# EAGLE board PCB.PCB (EAGLE 8.3.2)
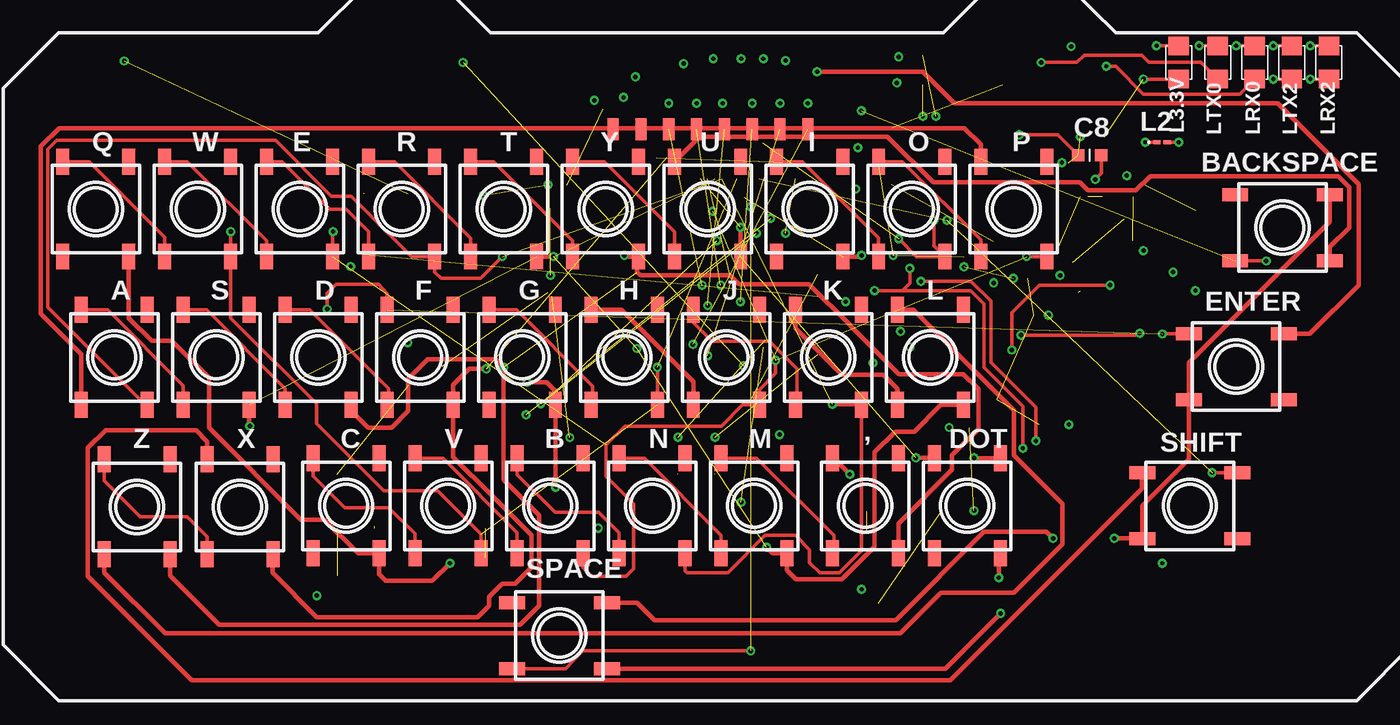
[diagram p0: board, top side]
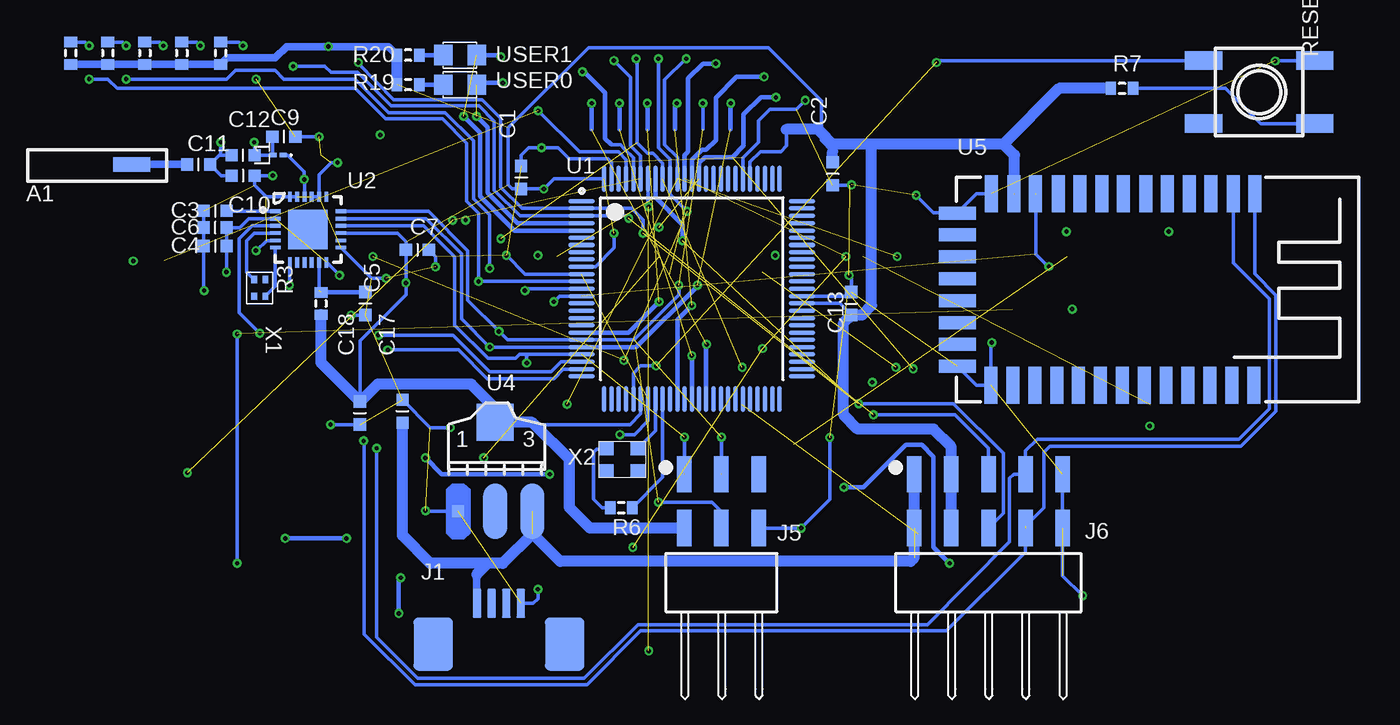
[diagram p1: board, bottom side, seen from below]

No outline drawn. Coordinates in mm, seen from the top.
Copper layers (1*16): Top 0.035mm / dielectric 1.5mm / Bottom 0.035mm
Design rules "PCB": minimum track width 6mil, minimum drill 0.35mm, track to track 6mil, track to pad 6mil, pad to pad 6mil, via to via 6mil, smd to smd 6mil, copper to edge 40mil, drill to drill 6mil, minimum pad ring 0mil, minimum via ring 0mil, stop-mask expansion 4mil, vias tented up to drill 0mil, thermal gap 10mil

## Footprints (pad centres in the part's own frame; a part is rotated, then mirrored left to right if it is on the bottom)
KHA_BUTTON_1PRIMARY = smd 1.778 x 0.889: 1 -3.251,2.261; 2 3.251,2.261; 3 -3.251,-2.261; 4 3.251,-2.261
ANTENNA_1PRIMARY = smd 2.54 x 1.016: 1 -2.159,-1.778
SMD-0603C_1PRIMARY = smd 0.838 x 0.838: 1 0,0.787; 2 0,-0.787
EINK_MODULE_1PRIMARY = smd 0.762 x 1.524: 1 -5.715,0; 2 -3.81,0; 3 -1.905,0; 4 0,0; 5 1.905,0; 6 3.81,0; 7 5.715,0; 8 7.62,0
ZIF_CONN_4P_TE84953-4_1PRIMARY = smd 0.61 x 2.007: 2 -1.499,5.385; 3 -0.508,5.385; 4 0.508,5.385; 5 1.499,5.385 | smd 2.692 x 3.607: 6 4.496,2.591; 7 -4.496,2.591
610106249121_1PRIMARY = smd 0.991 x 2.489: 1 -2.54,4.064; 2 0,4.064; 3 2.54,4.064; 4 -2.54,0.381; 5 0,0.381; 6 2.54,0.381 | drill 1.676 pad 1.676: 7 1.27,-4.064; 8 -1.27,-4.064
610110249121_1PRIMARY = smd 0.991 x 2.489: 1 -5.08,4.064; 2 -2.54,4.064; 3 0,4.064; 4 2.54,4.064; 5 5.08,4.064; 6 -5.08,0.381; 7 -2.54,0.381; 8 0,0.381; 9 2.54,0.381; 10 5.08,0.381 | drill 1.676 pad 1.676: 11 3.81,-4.064; 12 -3.81,-4.064
0603_1PRIMARY = smd 0.508 x 0.305: 1 -0.356,0; 2 0.356,0
SM-LED-0805-BLUE_1PRIMARY = smd 1.27 x 1.397: 1 0,0; 2 2.286,0
J1-0603_1PRIMARY = smd 0.711 x 0.889: 1 -0.762,0; 2 0.762,0
KHA_BUTTON_2PRIMARY = smd 2.54 x 1.27: 1 -3.81,2.159; 2 3.81,2.159; 3 -3.81,-2.159; 4 3.81,-2.159
100A_N_1PRIMARY = smd 1.803 x 0.305: 1 -7.544,5.994; 2 -7.544,5.512; 3 -7.544,5.004; 4 -7.544,4.496; 5 -7.544,3.988; 6 -7.544,3.505; 7 -7.544,2.997; 8 -7.544,2.489; 9 -7.544,2.007; 10 -7.544,1.499; 11 -7.544,0.991; 12 -7.544,0.508; 13 -7.544,0; 14 -7.544,-0.508; 15 -7.544,-0.991; 16 -7.544,-1.499; 17 -7.544,-2.007; 18 -7.544,-2.489; 19 -7.544,-2.997; 20 -7.544,-3.505; 21 -7.544,-3.988; 22 -7.544,-4.496; 23 -7.544,-5.004; 24 -7.544,-5.512; 25 -7.544,-5.994; 51 7.544,-5.994; 52 7.544,-5.512; 53 7.544,-5.004; 54 7.544,-4.496; 55 7.544,-3.988; 56 7.544,-3.505; 57 7.544,-2.997; 58 7.544,-2.489; 59 7.544,-2.007; 60 7.544,-1.499; 61 7.544,-0.991; 62 7.544,-0.508; 63 7.544,0; 64 7.544,0.508; 65 7.544,0.991; 66 7.544,1.499; 67 7.544,2.007; 68 7.544,2.489; 69 7.544,2.997; 70 7.544,3.505; 71 7.544,3.988; 72 7.544,4.496; 73 7.544,5.004; 74 7.544,5.512; 75 7.544,5.994 | smd 0.305 x 1.803: 26 -5.994,-7.544; 27 -5.512,-7.544; 28 -5.004,-7.544; 29 -4.496,-7.544; 30 -3.988,-7.544; 31 -3.505,-7.544; 32 -2.997,-7.544; 33 -2.489,-7.544; 34 -2.007,-7.544; 35 -1.499,-7.544; 36 -0.991,-7.544; 37 -0.508,-7.544; 38 0,-7.544; 39 0.508,-7.544; 40 0.991,-7.544; 41 1.499,-7.544; 42 2.007,-7.544; 43 2.489,-7.544; 44 2.997,-7.544; 45 3.505,-7.544; 46 3.988,-7.544; 47 4.496,-7.544; 48 5.004,-7.544; 49 5.512,-7.544; 50 5.994,-7.544; 76 5.994,7.544; 77 5.512,7.544; 78 5.004,7.544; 79 4.496,7.544; 80 3.988,7.544; 81 3.505,7.544; 82 2.997,7.544; 83 2.489,7.544; 84 2.007,7.544; 85 1.499,7.544; 86 0.991,7.544; 87 0.508,7.544; 88 0,7.544; 89 -0.508,7.544; 90 -0.991,7.544; 91 -1.499,7.544; 92 -2.007,7.544; 93 -2.489,7.544; 94 -2.997,7.544; 95 -3.505,7.544; 96 -3.988,7.544; 97 -4.496,7.544; 98 -5.004,7.544; 99 -5.512,7.544; 100 -5.994,7.544
SX1280_QFN24_4X4_1PRIMARY = smd 0.711 x 0.254: 1 -2.134,0.965; 2 -2.134,0.457; 3 -2.134,-0.025; 4 -2.134,-0.533; 5 -2.134,-1.041; 6 -2.134,-1.524; 13 2.362,-1.524; 14 2.362,-1.041; 15 2.362,-0.533; 16 2.362,-0.025; 17 2.362,0.457; 18 2.362,0.965 | smd 0.254 x 0.711: 7 -1.143,-2.54; 8 -0.635,-2.54; 9 -0.127,-2.54; 10 0.356,-2.54; 11 0.864,-2.54; 12 1.372,-2.54; 19 1.372,1.956; 20 0.864,1.956; 21 0.356,1.956; 23 -0.127,1.956; 24 -0.635,1.956; 25 -1.143,1.956 | smd 2.692 x 2.692: 22 0.102,-0.279
AMS1117_1PRIMARY = smd 0.838 x 0.838: 1 0,0 | smd 1.651 x 3.81: 2 2.54,0; 3 5.08,0 | smd 2.54 x 2.54: 4 2.54,6.096
HM-12_1PRIMARY = smd 2.54 x 0.889: 1 -3.81,-0.127; 2 -3.81,-1.6; 3 -3.81,-3.124; 4 -3.81,-4.597; 5 -3.81,-6.121; 6 -3.81,-7.595; 7 -3.81,-9.119; 8 -3.81,-10.592; 9 -3.81,-12.116; 10 -3.81,-13.589; 11 -3.81,-15.138; 12 -3.81,-16.612; 13 -3.81,-18.161; 22 9.296,-18.212; 23 9.296,-16.688; 24 9.296,-15.189; 25 9.296,-13.691; 26 9.296,-12.192; 27 9.296,-10.693; 28 9.296,-9.195; 29 9.296,-7.696; 30 9.296,-6.198; 31 9.296,-4.699; 32 9.296,-3.2; 33 9.296,-1.702; 34 9.296,-0.203 | smd 0.889 x 2.54: 14 -2.489,-20.498; 15 -0.991,-20.498; 16 0.508,-20.498; 17 2.007,-20.498; 18 3.505,-20.498; 19 5.004,-20.498; 20 6.502,-20.498; 21 8.001,-20.498
CRYSTAL_52MHZ_1PRIMARY = smd 0.483 x 0.381: 1 -0.508,-0.381; 2 0.635,-0.381; 3 0.635,0.381; 4 -0.508,0.381
PCBCOMPONENT_1_1PRIMARY = smd 0.991 x 0.889: 1 -1.118,-0.737; 2 1.016,-0.737; 3 1.016,0.787; 4 -1.118,0.787

## Placement (x,y rotation side)
,  SW  [KHA_BUTTON_1PRIMARY]  114.94,46.35 90 top
A  SW  [KHA_BUTTON_1PRIMARY]  63.5,56.52 90 top
A1  Antenna  [ANTENNA_1PRIMARY]  144.65,67.94 180 bottom
B  SW  [KHA_BUTTON_1PRIMARY]  93.34,46.35 90 top
BACKSPACE  SW  [KHA_BUTTON_1PRIMARY]  143.51,65.41 180 top
C  SW  [KHA_BUTTON_1PRIMARY]  79.38,46.35 90 top
C1  approved_sub_OK  [SMD-0603C_1PRIMARY]  115.82,68.83 0 bottom
C2  approved_sub_OK  [SMD-0603C_1PRIMARY]  94.49,69.09 180 bottom
C3  approved_sub_OK  [SMD-0603C_1PRIMARY]  136.78,66.55 270 bottom
C4  approved_sub_OK  [SMD-0603C_1PRIMARY]  136.78,64.14 270 bottom
C5  approved_sub_OK  [SMD-0603C_1PRIMARY]  126.49,60.2 180 bottom
C6  approved_sub_OK  [SMD-0603C_1PRIMARY]  136.78,65.41 90 bottom
C7  approved_sub_OK  [SMD-0603C_1PRIMARY]  122.94,63.88 270 bottom
C8  approved_sub_OK  [SMD-0603C_1PRIMARY]  130.3,70.36 90 top
C9  approved_sub_OK  [SMD-0603C_1PRIMARY]  132.08,71.63 270 bottom
C10  approved_sub_OK  [SMD-0603C_1PRIMARY]  134.87,68.96 270 bottom
C11  approved_sub_OK  [SMD-0603C_1PRIMARY]  137.92,69.72 90 bottom
C12  approved_sub_OK  [SMD-0603C_1PRIMARY]  134.87,70.36 90 bottom
C13  approved_sub_OK  [SMD-0603C_1PRIMARY]  93.22,60.2 0 bottom
C17  approved_sub_OK  [SMD-0603C_1PRIMARY]  123.95,52.83 0 bottom
C18  approved_sub_OK  [SMD-0603C_1PRIMARY]  126.87,52.7 0 bottom
D  SW  [KHA_BUTTON_1PRIMARY]  77.47,56.52 90 top
DOT  SW  [KHA_BUTTON_1PRIMARY]  121.92,46.35 270 top
E  SW  [KHA_BUTTON_1PRIMARY]  76.2,66.67 90 top
ENTER  SW  [KHA_BUTTON_1PRIMARY]  140.34,55.88 0 top
F  SW  [KHA_BUTTON_1PRIMARY]  84.45,56.52 90 top
G  SW  [KHA_BUTTON_1PRIMARY]  91.44,56.52 90 top
H  SW  [KHA_BUTTON_1PRIMARY]  98.42,56.52 90 top
H2  EInk_LCD_Module  [EINK_MODULE_1PRIMARY]  103.38,72.14 0 top
I  SW  [KHA_BUTTON_1PRIMARY]  111.12,66.67 90 top
J  SW  [KHA_BUTTON_1PRIMARY]  105.41,56.52 90 top
J1  USB_Micro_Type_B  [ZIF_CONN_4P_TE84953-4_1PRIMARY]  117.35,34.29 0 bottom
J5  06p  [610106249121_1PRIMARY]  102.11,44.45 0 bottom
J6  10p  [610110249121_1PRIMARY]  83.82,44.45 0 bottom
K  SW  [KHA_BUTTON_1PRIMARY]  112.39,56.52 90 top
L  SW  [KHA_BUTTON_1PRIMARY]  119.38,56.52 90 top
L1  Inductor  [0603_1PRIMARY]  132.49,70.36 180 bottom
L2  Inductor  [0603_1PRIMARY]  135.25,71.25 0 top
L3.3V  LED_SMD  [SM-LED-0805-BLUE_1PRIMARY]  136.4,77.85 270 top
LRX0  LED_SMD  [SM-LED-0805-BLUE_1PRIMARY]  141.6,77.85 270 top
LRX2  LED_SMD  [SM-LED-0805-BLUE_1PRIMARY]  146.69,77.85 270 top
LTX0  LED_SMD  [SM-LED-0805-BLUE_1PRIMARY]  139.06,77.85 270 top
LTX2  LED_SMD  [SM-LED-0805-BLUE_1PRIMARY]  144.15,77.85 270 top
M  SW  [KHA_BUTTON_1PRIMARY]  107.31,46.35 90 top
N  SW  [KHA_BUTTON_1PRIMARY]  100.33,46.35 90 top
O  SW  [KHA_BUTTON_1PRIMARY]  118.11,66.67 90 top
P  SW  [KHA_BUTTON_1PRIMARY]  125.09,66.67 90 top
Q  SW  [KHA_BUTTON_1PRIMARY]  62.23,66.67 90 top
R  SW  [KHA_BUTTON_1PRIMARY]  83.19,66.67 90 top
R3  Res3  [J1-0603_1PRIMARY]  129.54,60.2 270 bottom
R4  Res3  [J1-0603_1PRIMARY]  136.4,77.34 90 bottom
R6  Res3  [J1-0603_1PRIMARY]  108.97,46.23 0 bottom
R7  Res3  [J1-0603_1PRIMARY]  74.68,74.93 180 bottom
R17  Res3  [J1-0603_1PRIMARY]  139.06,77.34 270 bottom
R18  Res3  [J1-0603_1PRIMARY]  141.6,77.34 270 bottom
R19  Res3  [J1-0603_1PRIMARY]  123.57,75.18 180 bottom
R20  Res3  [J1-0603_1PRIMARY]  123.57,77.22 180 bottom
R21  Res3  [J1-0603_1PRIMARY]  146.69,77.34 270 bottom
R22  Res3  [J1-0603_1PRIMARY]  144.15,77.34 270 bottom
RESET  SW  [KHA_BUTTON_2PRIMARY]  65.28,74.68 180 bottom
S  SW  [KHA_BUTTON_1PRIMARY]  70.48,56.52 90 top
SHIFT  SW  [KHA_BUTTON_1PRIMARY]  137.16,46.35 0 top
SPACE  SW  [KHA_BUTTON_1PRIMARY]  93.98,37.47 180 top
T  SW  [KHA_BUTTON_1PRIMARY]  90.17,66.67 90 top
U  SW  [KHA_BUTTON_1PRIMARY]  104.14,66.67 90 top
U1  ATmega2560-8AU-3.3V  [100A_N_1PRIMARY]  104.14,61.21 0 bottom
U2  SX1280  [SX1280_QFN24_4X4_1PRIMARY]  130.53,65.56 0 bottom
U4  AMS1117_3.3V  [AMS1117_1PRIMARY]  120.14,45.97 0 bottom
U5  Bluetooth_HM-12  [HM-12_1PRIMARY]  65.46,63.91 270 bottom
USER0  LED_SMD  [SM-LED-0805-BLUE_1PRIMARY]  121.16,75.18 0 bottom
USER1  LED_SMD  [SM-LED-0805-BLUE_1PRIMARY]  121.16,77.22 0 bottom
V  SW  [KHA_BUTTON_1PRIMARY]  86.36,46.35 90 top
W  SW  [KHA_BUTTON_1PRIMARY]  69.22,66.67 90 top
X  SW  [KHA_BUTTON_1PRIMARY]  72.11,46.28 90 top
X1  52Mhz  [CRYSTAL_52MHZ_1PRIMARY]  133.73,61.21 90 bottom
X2  8MHz  [PCBCOMPONENT_1_1PRIMARY]  108.97,49.53 180 bottom
Y  SW  [KHA_BUTTON_1PRIMARY]  97.16,66.67 90 top
Z  SW  [KHA_BUTTON_1PRIMARY]  65.05,46.28 90 top

## Library data of the parts
, A A1 B BACKSPACE C C1-C13 C17 C18 D DOT E ENTER F G H H2 I J J1 J5 J6 K L L1 L2 L3.3V LRX0 LRX2 LTX0 LTX2 M N O P Q R R3 R4 R6 R7 R17-R22 RESET S SHIFT SPACE T U U1 U2 U4 U5 USER0 USER1 V W X X1 X2 Y Z = PCB

## Nets
3.3V: J6.2 J6.7 U5.12
5V: J1.2 J6.1 J6.6 U4.3
AHREF: U1.98
GND: J6.5 J6.10 U5.21 U5.22
HM-12-RESET: U1.14 U5.11
LCD_BUSY: U1.40
LCD_CE0: U1.36
LCD_CS: U1.19
LCD_RESET: U1.38
MISO: J5.1 U1.22
MOSI: J5.5
NETC9_2: L1.2
NETR6_1: R6.1
NETU1_4: U1.4
NETU1_5: U1.5
ROW1: U1.97
ROW2: U1.96
ROW3: U1.95
RST: J5.3
RXD0: J6.8 U1.2
RXD2: J6.9 U1.12 U5.1
SCK: J5.2
SX1280_BUSY: U1.24
SX1280_RESET: U1.23
TXD0: J6.3 U1.3
TXD2: J6.4 U1.13 U5.2
USB_D+: J1.4
USB_D-: J1.3
XTAL1: R6.2 U1.34
XTAL2: U1.33

## Tracks (layer width: path | path; a pad name or v marks a point on that pad's centre or on a via)
3.3V  (via drill 0.3 pad 0.61)  (4 unrouted)
  Bottom 0.254: v109.47,65.02 109.47,64.01 110.74,62.74 111.66,62.74 111.68,62.71 | 110.13,68.76 113.56,68.76 v114.28,68.05 115.82,68.05 | 126.87,53.49 126.87,57.66 123.72,60.81 v123.72,61.62 123.72,64.44 124.28,65.02 128.17,65.02 | 93.22,59.41 94,60.22 96.6,60.22 | 115.82,68.05 116.43,68.05 116.71,68.33 116.71,72.24 111.23,77.72 98.88,77.72 95.25,74.09 95.25,71.88 95.25,71.37 94.49,70.61 | 115.06,52.07 114.91,51.92 108.36,51.92 107.64,52.65 107.64,53.67 | 115.82,68.05 115.88,68 | 97.66,72.14 97.66,70.99 98.04,70.61 99.44,70.61 100.15,69.9 100.15,68.76
  Bottom 0.508: 146.69,76.58 136.4,76.58 135.97,77.04 132.66,77.04 131.9,77.8 v129.03,77.8 124.89,77.8 124.33,77.22
  Bottom 0.762: J6.7 J6.2 86.36,50.39 87.58,51.61 92.79,51.61 93.75,52.6 93.75,58.88 93.22,59.41 92.48,59.41 91.82,60.07 91.82,71.12 | 82.8,71.12 82.04,70.36 82.04,67.72 | 82.8,71.12 91.82,71.12 | 82.8,71.12 78.99,74.93 75.44,74.93 | 124.33,75.18 124.33,77.22 | 114.91,51.92 112.52,49.53 112.52,46.23 111.12,44.83 104.65,44.83 | 97.66,72.14 95.5,72.14 95.25,71.88 94.49,71.12 91.82,71.12 | 115.06,52.07 117.6,52.07 117.6,53.03 119.25,54.69 125.65,54.69 126.87,53.49 129.54,56.16 129.54,59.44 | 94.49,69.88 94.49,70.61
5V  (2 unrouted)
  Bottom 0.508: J1.2 118.87,39.7 118.87,41.66
  Bottom 0.762: J6.1 88.9,42.8 89.15,42.55 113.16,42.55 115.06,44.45 117.09,42.42 118.11,42.42 | 123.95,52.05 123.95,44.32 122.05,42.42 118.11,42.42 | 118.11,42.42 118.87,41.66
COL1  (via drill 0.3 pad 0.61)  (2 unrouted)
  Top 0.305: v93.73,47.62 93.7,47.65 93.7,54.2 93.09,54.81 v91.77,54.81 | 64.49,63.42 64.49,59.21 66.04,57.66 67.44,57.66 69.98,55.12 69.98,51.71 76.25,45.41 77.88,45.41 80.19,43.1 81.64,43.1 81.64,41.68 82.07,41.22 85.27,41.22 v86.49,42.42 | v114.68,63.5 114.61,63.42 113.39,63.42
  Bottom 0.305: v93.73,47.62 92.38,47.62 89.48,50.52 88.39,50.52 87.58,49.71 87.58,43.51 v86.49,42.42 | v104.78,64.52 104.78,65.61 106.63,67.49 106.63,68.76
COL2  (via drill 0.3 pad 0.61)  (3 unrouted)
  Top 0.254: v71.48,65.13 71.48,59.21 77.34,53.34 77.34,51.97 81.94,47.37 85.62,47.37 88.62,44.4 88.62,43.1 | v117.22,64.64 118.44,63.42 120.37,63.42 119.63,64.16 v119.63,65.91 | 100.69,53.26 v100.69,55.83
  Bottom 0.254: 106.15,68.76 106.15,69.83 106.81,70.48 107.19,70.48 107.9,71.2 107.9,76.91 v107.95,76.96
COL3  (via drill 0.3 pad 0.61)  (3 unrouted)
  Top 0.254: 95.61,43.1 95.61,42.11 96.19,41.53 98.55,41.53 99.06,42.04 99.06,46.51 97.18,48.39 97.18,50.52 98.48,51.82 105.08,51.82 106.53,53.26 107.67,53.26 107.67,54.3 108.79,55.42 v108.79,56.31 | v125.98,63.42 127.36,63.42 | v78.49,65.13 78.46,65.1 78.46,63.42
  Bottom 0.254: v104.47,66.52 105.64,67.69 105.64,70.08 106.43,70.87 v106.43,76.96
COL4  (via drill 0.3 pad 0.61)  (2 unrouted)
  Top 0.254: 102.59,43.1 102.59,41.91 102.72,41.78 105.54,41.78 108.05,44.32 110.13,44.32 111.12,43.33 111.12,42.47 111.81,41.78 113.16,41.78 114.66,43.28 114.66,53.26 112.72,53.26 v112.67,53.31 | v90.07,63.42 88.57,61.92 85.88,61.92 85.45,62.36 85.45,63.42 83.87,63.42 79.73,67.56 78.36,67.56 74.55,71.37 59.54,71.37 58.93,70.76 58.93,59.94 65.61,53.26 65.76,53.26
  Bottom 0.254: 105.13,68.76 105.13,70.21 105.99,71.07 105.99,75.51 v104.52,76.96
COL5  (via drill 0.3 pad 0.61)  (4 unrouted)
  Top 0.305: 121.64,53.26 120.12,53.26 118.29,51.44 116.99,51.44 115.57,50.01 115.57,43.54 113.33,41.33 110.19,41.33 109.58,41.94 109.58,43.1 108.58,43.1 v108.18,43.51 | 92.43,63.42 v93.57,63.42 | v72.77,51.82 72.75,51.87 72.75,53.26
  Bottom 0.305: v102.49,76.63 103.38,76.63 104.39,75.62 104.39,70.61 104.65,70.36 104.65,68.76
  other vias: 99.29,57.12
COL6  (via drill 0.3 pad 0.61)  (2 unrouted)
  Top 0.305: 99.31,63.42 99.31,62.36 99.54,62.13 105.66,62.13 106.27,61.52 111.07,61.52 113.87,58.75 113.87,58.73 117.22,55.37 121.67,55.37 122.68,54.36 122.68,51.61 120.88,49.81 120.88,48.82 117.2,45.14 117.2,43.1 | 99.31,63.42 99.42,63.42 | 99.31,63.42 98.5,63.42 v98.42,63.5 | 67.31,43.03 67.31,41.58 70.69,38.23 91.29,38.23 92.58,39.5 92.58,45.72 90.17,48.13 v90.17,55.83 89.61,56.39 84.94,56.39 83.62,55.04 83.62,52.86 82.47,51.71 80.87,51.71 79.73,52.86 79.73,53.26
  Bottom 0.305: v99.19,75.72 101.07,75.72 102.49,74.3 102.49,71.37 103.15,70.74 103.45,70.74 104.14,70.05 104.14,68.76
COL7  (via drill 0.3 pad 0.61)  (3 unrouted)
  Top 0.305: v88.98,55.73 87.78,55.73 86.72,54.63 86.72,49.68 88.01,48.36 88.04,48.36 92.08,44.32 92.08,42.16 90.93,41.02 90.04,41.02 89.15,40.13 89.15,39.5 88.37,38.71 77.37,38.71 74.35,41.76 74.35,43.03 | v106.38,65.43 106.4,65.41 106.4,63.42 | 119.66,49.61 119.66,49.63 v118.39,49.63
  Bottom 0.305: v98.37,74.32 99.42,74.32 100.58,73.15 100.58,70.99 101.35,70.23 103.25,70.23 103.63,69.85 103.63,68.76
COL8  (via drill 0.3 pad 0.61)
  Top 0.305: v127.79,44.12 127.33,44.58 123.06,44.58 117.02,38.53 100.48,38.53 99.29,39.73 97.23,39.73 | 146.76,67.67 146.76,65.81 137.08,56.13 137.08,49.53 133.91,46.35 133.91,44.09 133.88,44.12 v131.98,44.12
  Bottom 0.305: v127.79,44.12 v131.98,44.12
GND  (via drill 0.3 pad 0.61)  (26 unrouted)
  Top 0.254: v133.99,75.56 136.4,75.56 | v125.48,71.75 128.12,71.75 129.51,70.36
  Bottom 0.254: 137.57,66.55 137.57,61.11 v137.54,61.09 | J6.5 78.74,41.58 v77.37,40.21 | 115.85,39.67 115.01,39.67 114.68,40.01 v114.68,40.64 | v94.69,51.03 94.69,46.81 v96.65,44.83 99.57,44.83 | 131.17,67.51 133.3,67.51 134.09,68.3 134.09,68.96 v132.84,68.96 | 115.82,69.62 115.82,70.36 115.32,70.87 v114.43,70.87 113.28,70.87 112.55,70.13 109.88,70.13 109.65,69.88 109.65,68.76 | v129.67,71.63 131.29,71.63 | v116.84,63.5 115.55,62.2 111.68,62.2 | v121.69,62.71 121.69,63.4 122.15,63.88 | v128.4,69.85 128.85,69.85 129.67,69.04 129.67,67.51 130.18,67.51 | v133.99,63.83 133.27,64.52 132.66,64.52 | v120.67,51.71 122.07,51.71 123.95,53.62 | U5.21 84.66,54.61 83.64,54.61 83.64,57.45 v83.59,57.53 | 126.49,59.41 v127.48,59.41 | v96.37,74.12 96.98,73.51 98.78,73.51 99.57,72.72 99.57,71.25 100.64,70.18 100.64,68.76 | 83.62,67.72 84.63,67.72 85.95,66.42 87.58,66.42 v88.77,67.61 | v93.19,68.33 93.27,68.33 93.29,68.3 94.49,68.3 | v93.37,62.13 93.22,61.95 93.22,60.98 93.47,60.71 96.6,60.71 | v125.07,61.92 126.06,61.92 128.17,64.03 | v122.38,46.02 122.33,45.97 120.14,45.97 | v64.19,76.81 64.16,76.83 61.47,76.83 | v109.07,51.23 108.08,51.23 107.14,52.17 107.14,53.67 | 126.87,51.92 v128.88,51.92
HM-12-RESET  (via drill 0.3 pad 0.61)  (2 unrouted)
  Bottom 0.254: 80.57,67.72 80.57,63.58 79.68,62.69 v79.68,62.74 | v113.59,60.33 113.18,60.71 U1.14
LCD_BUSY  (via drill 0.3 pad 0.61)  (1 unrouted)
  Bottom 0.305: U1.40 103.15,57.38 v103.12,57.4 | 111,72.14 v111,73.91
LCD_CE0  (via drill 0.3 pad 0.61)  (1 unrouted)
  Bottom 0.305: U1.36 105.13,59.08 v104.14,60.07 | 105.28,72.14 105.28,73.79 v105.16,73.91
LCD_CS  (via drill 0.3 pad 0.61)  (1 unrouted)
  Bottom 0.305: v106.38,60.33 108.48,58.22 U1.19 | 107.19,72.14 v107.19,73.91
LCD_RESET  (via drill 0.3 pad 0.61)  (1 unrouted)
  Bottom 0.305: U1.38 v104.14,56.64 | 109.09,72.14 v109.09,73.91
MISO  (via drill 0.3 pad 0.61)  (2 unrouted)
  Bottom 0.254: 115.32,56.72 115.95,56.72 116.2,56.46 118.08,56.46 120.37,58.73 120.37,63.4 122.5,65.53 128.17,65.53 | v115.44,56.13 115.44,56.59 115.32,56.72 | 104.65,48.54 v104.65,51.05 | U1.22 115.32,56.72
MOSI  (via drill 0.3 pad 0.61)  (2 unrouted)
  Bottom 0.254: v106.43,46.61 102.77,46.61 102.11,45.95 J5.5 | 111.68,57.23 v117.98,57.23 119.91,59.16 119.91,63.6 122.35,66.02 128.17,66.02
  Bottom 0.305: 101.47,72.14 v101.47,73.91 | 111.68,57.23 107.95,57.23 103.76,61.39 v103.76,61.47
NET,_1
  Top 0.254: 105.05,49.61 107.49,49.61 112.78,44.32 112.78,43.2 112.67,43.1
NET,_2  (via drill 0.3 pad 0.61)
  Top 0.305: 112.67,49.61 112.8,49.61 v113.87,48.51 | v122.38,49.63 122.4,49.61 124.18,49.61
  Bottom 0.305: v113.87,48.51 121.28,48.51 v122.38,49.63
NETA1_1
  Bottom 0.508: 138.71,69.72 142.49,69.72
NETA_1
  Top 0.305: 122.83,69.93 122.83,71.09 121.72,72.21 59.72,72.21 58.47,70.97 58.47,59.51 61.24,56.72 61.24,53.26
NETA_2
  Top 0.254: 61.24,59.77 63.04,59.77 68.22,54.59 68.22,53.26
NETB_1
  Top 0.254: 91.08,43.1 91.08,44.5 86,49.61 84.1,49.61
NETB_2
  Top 0.254: 91.08,49.61 91.08,48.49 93.67,45.92 96.67,45.92 98.07,44.5 98.07,43.1
NETBACKSPACE_1
  Top 0.305: 146.76,63.14 146.76,64.08 148.08,65.41 148.08,68.15 147.32,68.91 134.44,68.91 133.48,67.94 130.18,67.94 129.62,68.5 119.58,68.5 116.46,71.63 103.58,71.63 101.88,69.93
NETC3_1
  Bottom 0.254: 132.66,66.52 135.99,66.52 135.99,66.55
NETC4_1  (via drill 0.3 pad 0.61)  (1 unrouted)
  Bottom 0.254: 135.81,62.36 v136.02,62.36 135.99,62.38 135.99,65.41 135.1,65.41 134.49,66.02 132.66,66.02 | v128.27,62.13 129.16,63.02
NETC5_2  (1 unrouted)
  Bottom 0.254: 129.67,61.09 129.67,63.02
  Bottom 0.305: 126.49,60.98 129.51,60.98 129.54,60.96
NETC8_2  (via drill 0.3 pad 0.61)
  Top 0.254: v130.68,68.71 131.09,69.11 131.09,70.36
  Bottom 0.254: 132.13,70.36 131.83,70.36 130.68,69.22 v130.68,68.71 130.66,68.68 130.66,67.51
NETC9_2  (via drill 0.3 pad 0.61)
  Top 0.254: v134.11,71.25 134.9,71.25
  Bottom 0.254: 132.87,71.63 132.84,71.6 L1.2 134.09,70.36 134.09,71.22 v134.11,71.25
NETC10_2  (via drill 0.3 pad 0.61)
  Top 0.254: 135.61,71.25 v136.4,71.25
  Bottom 0.254: 136.5,70.36 136.4,70.46 v136.4,71.25 | 135.66,68.96 136.37,68.96 137.13,69.72 136.5,70.36 | 135.79,70.36 136.5,70.36
NETC_2
  Top 0.254: 77.11,49.61 77.11,48.39 79.27,46.23 82.3,46.23 84.1,44.42 84.1,43.1
NETD_1
  Top 0.254: 68.22,59.77 69.83,59.77 75.21,54.38 75.21,53.26
NETD_2
  Top 0.254: 75.21,59.77 76.89,59.77 82.27,54.38 82.27,53.37 82.3,53.37 82.19,53.26
NETDOT_2  (via drill 0.3 pad 0.61)
  Top 0.305: 97.23,35.2 120.42,35.2 v124.21,38.99 | v124.08,41.43 124.08,43.03 124.18,43.1
  Bottom 0.305: v124.21,38.99 124.21,41.3 v124.08,41.43
NETE_1
  Top 0.254: 66.95,69.93 68.5,69.93 73.94,64.49 73.94,63.42
NETE_2
  Top 0.254: 73.94,69.93 74.98,69.93 78.23,66.67 79.38,66.67 80.92,65.13 80.92,63.42
NETENTER_1  (via drill 0.3 pad 0.61)  (1 unrouted)
  Top 0.254: 82.19,59.77 82.19,60.88 81.58,61.52 78.69,61.52 78.08,60.91 v78.08,59.82 | v135.28,58.12 135.28,58.14 137.08,58.14
  Bottom 0.254: v135.28,42.42 v135.28,58.12
NETG_2
  Top 0.254: 89.18,59.77 91.03,59.77 96.27,54.53 96.27,53.37 96.16,53.26
NETH_2
  Top 0.305: 103.15,53.26 103.15,54.84 98.25,59.77 96.16,59.77
NETI_2
  Top 0.254: 115.85,63.42 115.85,64.72 110.64,69.93 108.86,69.93
NETJ_2
  Top 0.254: 103.15,59.77 103.15,58.9 104.42,57.63 108.36,57.63 110.24,55.73 110.24,53.37 110.13,53.26
NETK_2
  Top 0.305: 110.13,59.77 110.13,58.52 113.33,55.32 116.18,55.32 117.12,54.38 117.12,53.26
NETL3.3V_1  (via drill 0.3 pad 0.61)
  Top 0.254: v134.87,77.85 136.4,77.85
  Bottom 0.254: v134.87,77.85 135.13,78.11 136.4,78.11
NETL_2
  Top 0.305: 62.81,43.03 62.81,41.78 66.98,37.62 117.35,37.62 120.12,40.39 125.09,40.39 128.42,43.71 128.42,46.48 125.09,49.81 125.09,52.91 118.24,59.77 117.12,59.77
NETLRX0_1  (via drill 0.3 pad 0.61)
  Top 0.254: v140.34,77.85 141.6,77.85
  Bottom 0.254: v140.34,77.85 140.59,78.11 141.6,78.11
NETLRX2_1  (via drill 0.3 pad 0.61)
  Top 0.254: v145.41,77.85 146.69,77.85
  Bottom 0.254: v145.41,77.85 145.67,78.11 146.69,78.11
NETLTX0_1  (via drill 0.3 pad 0.61)
  Top 0.254: v137.79,77.85 139.06,77.85
  Bottom 0.254: v137.79,77.85 138.05,78.11 139.06,78.11
NETLTX2_1  (via drill 0.3 pad 0.61)
  Top 0.254: v142.88,77.85 144.15,77.85
  Bottom 0.254: v142.88,77.85 143.13,78.11 144.15,78.11
NETM_1
  Top 0.254: 98.07,49.61 99.8,49.61 105.05,44.32 105.05,43.1
NETO_2
  Top 0.254: 122.83,63.42 122.83,64.57 117.47,69.93 115.85,69.93
NETQ_2
  Top 0.254: 59.97,69.93 61.77,69.93 66.95,64.75 66.95,63.42
NETR6_1
  Bottom 0.254: R6.1 110.29,46.23 110.87,46.81 110.87,50.01 110.67,50.22 110.03,50.22 109.98,50.27
NETR7_1
  Bottom 0.254: 73.91,74.93 67.59,74.93 65.18,72.52 61.47,72.52
NETR19_1
  Bottom 0.305: 121.16,75.18 122.81,75.18
NETR20_1
  Bottom 0.305: 121.16,77.22 122.81,77.22
NETR_2
  Top 0.254: 80.92,69.93 82.68,69.93 87.91,64.67 87.91,63.42
NETSHIFT_1
  Top 0.305: 133.88,48.64 133.88,47.52 120.78,34.42 68.78,34.42 61.67,41.53 61.67,50.32 62.89,51.51 69.09,51.51 69.85,50.75 69.85,49.53
NETT_2
  Top 0.254: 87.91,69.93 89.46,69.93 94.89,64.49 94.89,63.42
NETU1_4  (via drill 0.3 pad 0.61)  (1 unrouted)
  Bottom 0.305: v118.87,73.03 118.14,72.29 118.14,67.79 116.08,65.71 U1.4 | v117.09,75.31 118.75,75.31 118.87,75.18
NETU1_5  (via drill 0.3 pad 0.61)  (1 unrouted)
  Bottom 0.305: v119.76,73.03 118.64,71.91 118.64,67.56 116.28,65.2 U1.5 | v117.22,77.09 117.35,77.22 118.87,77.22
NETU2_4
  Bottom 0.254: 134.11,61.85 134.62,62.36 134.62,64.52 134.11,65.02 132.66,65.02
NETU2_6
  Bottom 0.254: 132.66,64.03 132.66,61.39 133.35,60.71
NETU_1
  Top 0.254: 94.89,69.93 97.08,69.93 101.88,65.13 101.88,63.42
NETX_1
  Top 0.254: 62.81,49.53 62.81,48.08 65.28,45.62 68.48,45.62 69.85,44.25 69.85,43.03
RESET  (via drill 0.3 pad 0.61)  (1 unrouted)
  Bottom 0.254: 108.13,53.67 108.13,55.42 107.64,55.93 v106.58,55.93 | 69.09,76.83 87.25,76.83 v87.38,76.71
ROW1  (via drill 0.3 pad 0.61)  (1 unrouted)
  Top 0.254: v142.39,63.12 142.34,63.14 140.26,63.14
  Bottom 0.254: v114.66,73.41 111.84,70.59 109.17,70.59 108.64,70.05 U1.97
ROW2  (via drill 0.3 pad 0.61)
  Top 0.305: v111.63,76.07 118.87,76.07 121.03,73.91 143.18,73.91 148.72,68.38 148.72,61.47 145.39,58.14 143.59,58.14
  Bottom 0.254: 109.68,71.09 109.65,71.09 109.6,71.07 109.02,71.07 108.79,70.81 108.13,70.18 U1.96
  Bottom 0.305: 109.68,71.09 110.08,71.5 110.08,74.65 111.51,76.07 v111.63,76.07
ROW3  (via drill 0.3 pad 0.61)  (2 unrouted)
  Top 0.254: v138.68,48.62 140.41,48.62
  Bottom 0.254: U1.95 107.64,70.31 108.33,70.99 108.33,75.69 v109.47,76.83
  other vias: 120.52,65.91
ROW4  (via drill 0.3 pad 0.61)  (1 unrouted)
  Top 0.254: v107.09,36.42 95.58,36.42 94.39,35.2 90.73,35.2
  Bottom 0.254: v107.09,66.83 107.14,66.88 107.14,68.76
RXD0  (via drill 0.3 pad 0.61)  (1 unrouted)
  Top 0.254: v126.97,76.71 129.41,76.71 129.92,77.22 133.86,77.22 134.37,76.71 137.92,76.71 139.06,75.56
  Bottom 0.254: v126.97,76.71 126.97,76.61 124.56,74.17 118.52,74.17 117.22,72.87 117.22,68.15 115.77,66.73 U1.2 108.25,66.73 107.47,65.94 v107.47,65.02 | v92.71,53.34 86.21,53.34 82.8,49.94 82.8,45.85 J6.8
RXD2  (via drill 0.3 pad 0.61)  (1 unrouted)
  Top 0.254: v126.62,50.8 126.62,53.09 123.52,56.19 123.52,60.4 122.17,61.72 v118.75,61.72 | v145.41,75.56 146.69,75.56
  Bottom 0.254: v145.41,75.56 144.15,75.56 143.51,74.93 127.2,74.93 125.09,72.85 121.21,72.85 119.56,71.17 119.56,67.21 118.75,66.4 v118.75,61.72 U1.12 | U5.1 65.58,62.23 64.14,60.78 64.14,52.83 66.55,50.42 79.63,50.42 80.01,50.04 80.01,46.23 81.28,44.96 81.28,43.18 86.69,37.8 107.64,37.8 111.33,34.11 123.09,34.11 126.57,37.57 126.57,50.75 v126.62,50.8
SCK  (via drill 0.3 pad 0.61)  (3 unrouted)
  Bottom 0.254: v105.03,61.47 105.03,60.81 108.1,57.71 116.76,57.71 v117.35,58.29 119.48,60.43 119.48,63.83 122.17,66.52 128.17,66.52 | 103.38,72.14 v103.38,73.91 | 102.11,48.54 v102.11,51.05
SX1280_BUSY  (via drill 0.3 pad 0.61)
  Top 0.254: v131.7,61.47 126.87,61.47 124.97,59.56 v124.97,57.02
  Bottom 0.254: v124.97,57.02 120.12,57.02 118.16,55.07 113.59,55.07 112.95,55.7 U1.24 | 131.67,63.02 131.67,61.49 v131.7,61.47
SX1280_RESET  (via drill 0.3 pad 0.61)
  Top 0.254: v125.6,58.04 133.6,58.04 v133.73,58.17
  Bottom 0.254: v125.6,58.04 120.5,58.04 117.98,55.52 113.77,55.52 113.08,56.21 U1.23 | v133.73,58.17 135.13,59.56 135.13,64.64 134.24,65.53 132.66,65.53
TXD0  (via drill 0.3 pad 0.61)  (1 unrouted)
  Top 0.254: v131.44,76.45 132.08,76.45 133.99,74.55 140.59,74.55 141.6,75.56
  Bottom 0.254: v131.44,76.45 129.29,76.45 128.85,76.02 127.03,76.02 124.74,73.74 118.69,73.74 117.68,72.69 117.68,67.97 115.9,66.22 U1.3 108.64,66.22 v108.46,66.04 | J6.3 83.82,50.29 86.11,52.58 v91.69,52.58
TXD2  (via drill 0.3 pad 0.61)
  Top 0.254: v117.98,62.61 117.98,61.59 117.47,61.09 | v142.88,75.56 144.15,75.56 | 117.47,61.09 122.17,61.09 123.06,60.2 123.06,55.83 125.73,53.16 v125.73,50.29 | v115.57,61.09 117.47,61.09
  Bottom 0.254: v142.88,75.56 135.99,75.56 135.38,76.17 132.69,76.17 132.08,75.56 127.2,75.56 124.92,73.28 121.03,73.28 119.1,71.35 119.1,67.39 117.98,66.27 v117.98,62.61 | v125.73,50.29 125.73,37.36 122.91,34.54 111.51,34.54 107.82,38.23 88.01,38.23 82.37,43.89 82.37,48.23 82.07,48.51 J6.4 81.28,50.11 80.47,50.93 66.67,50.93 64.59,53.01 64.59,60.53 67.06,62.99 U5.2 | v115.57,61.09 115.44,61.21 U1.13
XTAL1
  Bottom 0.254: U1.34 106.15,48.31 R6.2
XTAL2
  Bottom 0.254: U1.33 106.63,51.49 107.85,50.27